# Altium PCB SENT.PcbDoc (part 2 of 2)
Units mil, origin at the board's own origin, x right, y up, seen from the top; angles counter-clockwise.
Board outline 2680 x 2680 mil, 2 copper layers (Top Layer, Bottom Layer); 78 components, 77 nets, 313 pads, 117 vias.
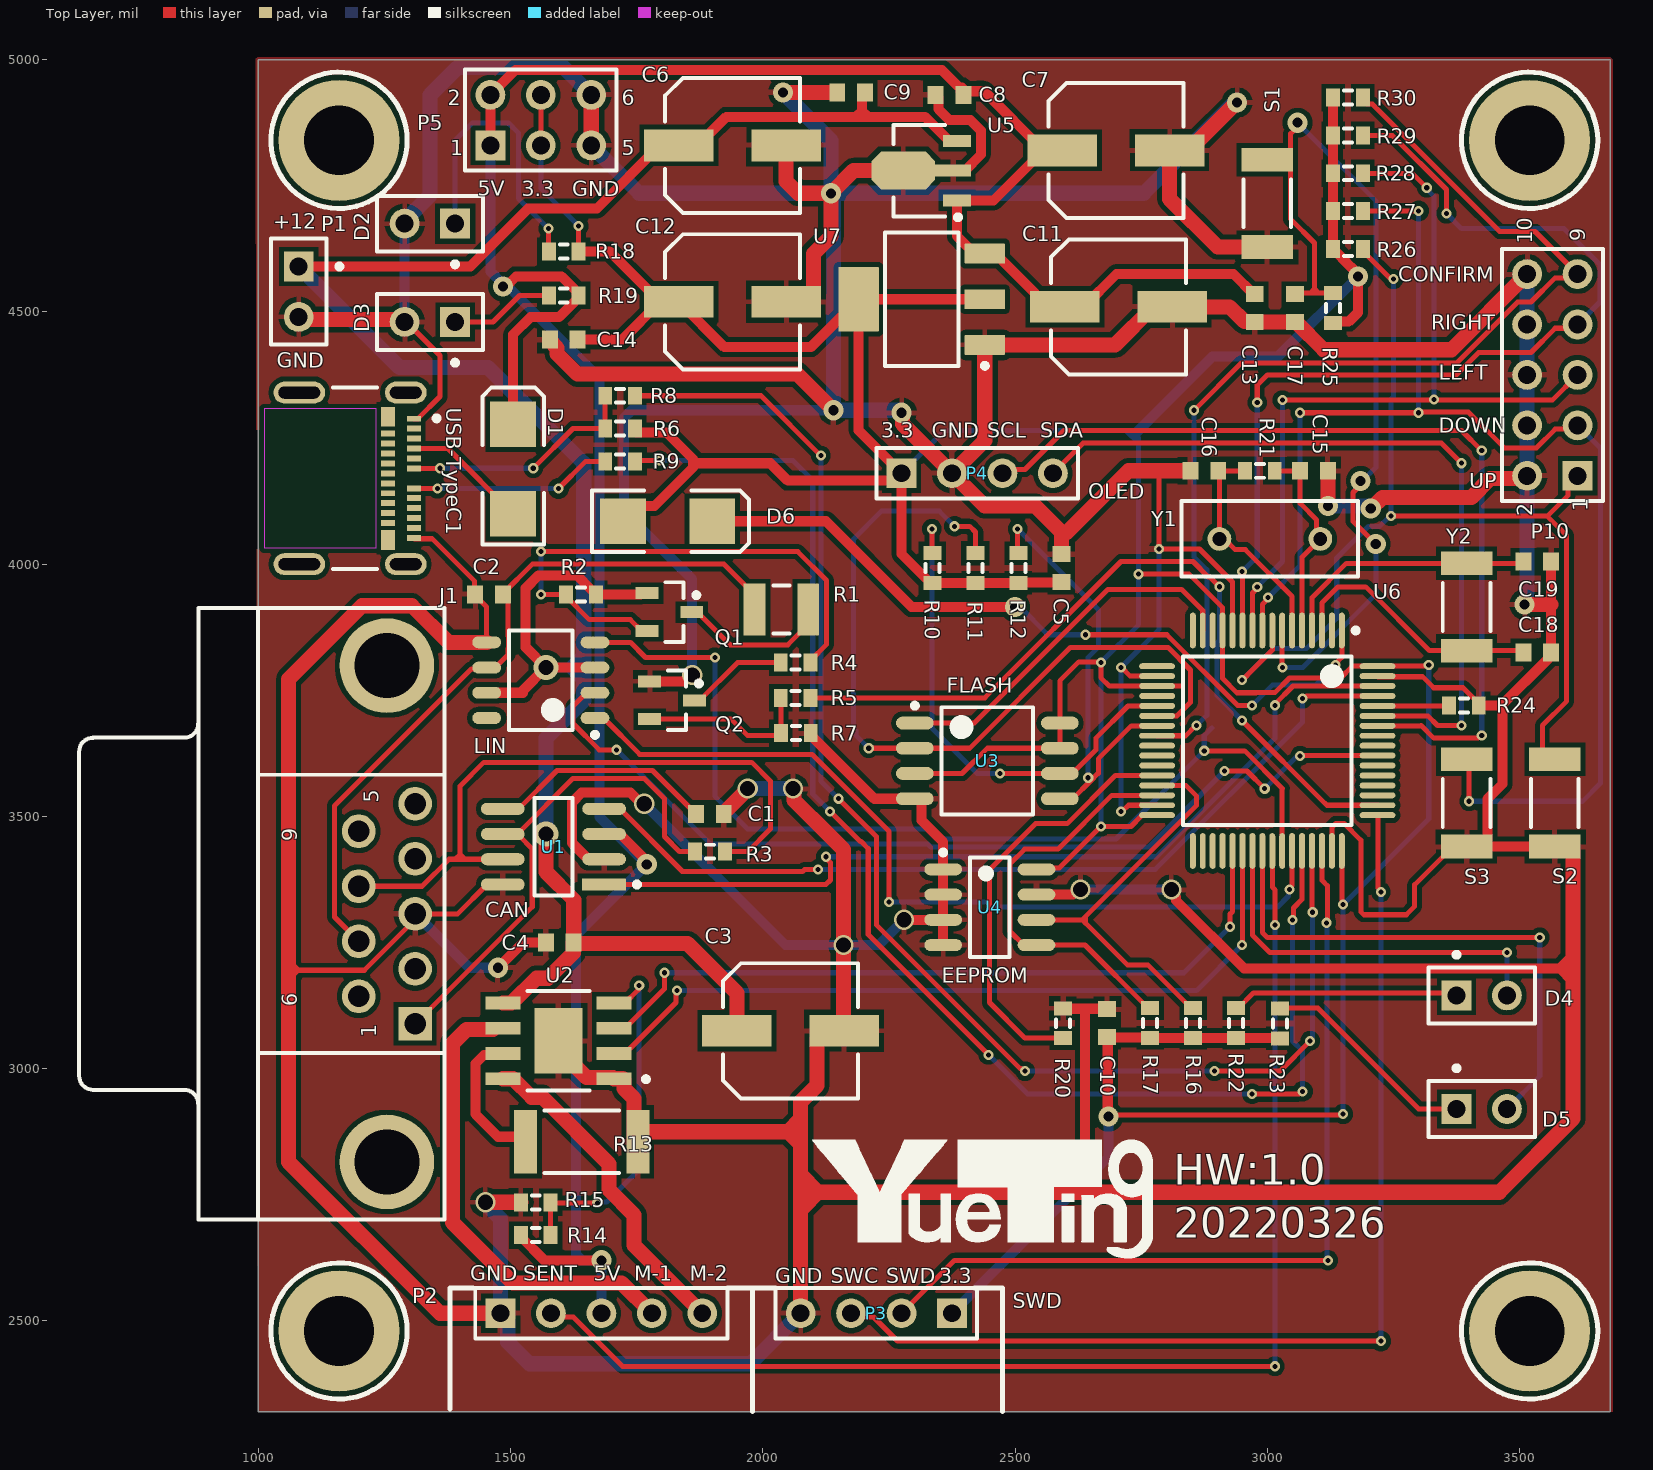
[diagram p0: Top Layer view]

## Via types
v1: diameter 20, hole 10, Top Layer to Bottom Layer, tented both sides, 88 vias
v2: diameter 40, hole 20, Top Layer to Bottom Layer, tented both sides, 18 vias
v3: diameter 40, hole 30, Top Layer to Bottom Layer, tented both sides, 9 vias
v4: diameter 50, hole 30, Top Layer to Bottom Layer, tented both sides, 2 vias

## Nets (pads, with @x,y where several pads share a name; then routed paths per layer and width w, separated by ;. In a path a pad name is that pad's centre, name@x,y a point inside that pad or via, vN(x,y) a via of type N, cw(c..) or ccw(c..) an arc to the next point about the centre after c; other vN are vias at no path point) (continued)
VCC: (continued)
  Bottom Layer w20: v4(1570,3795) 1615,3795 ; 1640,3795 1628.75,3795 ; 1645,3775 1635,3775 1615,3795 ; 1645,3811.25 1628.75,3795 ; 1645,3830 1645,3825 1615,3795 ; 1615,3795 1628.75,3795
  Bottom Layer w30: P1.1 1280,4390 1455,4390 1645,4200 1645,3830 ; v4(1570,3465) 1570,3655 1645,3730 1645,3775 1645,3811.25 1645,3825
pads on no net: J1.2 J1.4 J1.5 J1.6 J1.9 J1.10 J1.11 LIN.8 USB-TypeC1.1 USB-TypeC1.2 USB-TypeC1.3 USB-TypeC1.4 USB-TypeC1.A2 USB-TypeC1.A3 USB-TypeC1.A5 USB-TypeC1.A8 USB-TypeC1.A9 USB-TypeC1.A10 USB-TypeC1.A11 USB-TypeC1.B1 USB-TypeC1.B2 USB-TypeC1.B3 USB-TypeC1.B4 USB-TypeC1.B5 USB-TypeC1.B6 USB-TypeC1.B7 USB-TypeC1.B8 USB-TypeC1.B9 USB-TypeC1.B10 USB-TypeC1.B11 USB-TypeC1.B12

## Polygon pours and split planes (outlines as drawn)
GND on Bottom Layer "GND_L02_P000" (solid, pour order 0): 1000,5005 1005,5000 3680,5000 3680,2325 3670,2315 995,2315
GND on Top Layer "GND_L01_P001" (solid, pour order 1): 995,5005 3680,5005 3685,5000 3685,2320 1005,2320 1000,2325

## Silkscreen, mask and mechanical layers (free items; w line width, h text height)
Top Overlay:
  drawing of 21 lines, arcs and shapes, not listed
  text "5V" at 1435,4730 h30
  text "3.3" at 1521.82,4729.21 h30
  text "GND" at 1621.82,4729.21 h30
  text "+12" at 1030,4665 h30
  text "CONFIRM" at 3260,4560 h30
  text "RIGHT" at 3325,4465 h30
  text "GND" at 1036.82,4389.21 h30
  text "LEFT" at 3340,4365 h30
  text "DOWN" at 3340,4260 h30
  text "3.3" at 2235,4250 h30
  text "GND" at 2335,4250 h30
  text "SCL" at 2445,4250 h30
  text "SDA" at 2550,4250 h30
  text "UP" at 3400,4150 h30
  text "HW:1.0" at 2815,2770 h60
  text "20220326" at 2815,2665 h60
  text "GND" at 1420,2580 h30
  text "SENT" at 1525,2580 h30
  text "5V" at 1665,2580 h30
  text "M-1" at 1745,2580 h30
  text "M-2" at 1855,2580 h30
  text "GND" at 2025,2575 h30
  text "SWC" at 2135,2575 h30
  text "SWD" at 2245,2575 h30
  text "3.3" at 2350,2575 h30
Mechanical 1:
  lines w10: 1000,5000 1000,2320 3680,2320 3680,5000 1000,5000 ; 1000,5000 1000,5000

## Text inside footprints (layer, text, board x,y; h text height)
J1: Top Overlay "1" at 1234.09,3062.4 h30 r90; Top Overlay "5" at 1239.09,3527.4 h30 r90; Top Overlay "9" at 1076.85,3450.83 h30 r90; Top Overlay "6" at 1076.85,3123.66 h30 r90
P5: Top Overlay "1" at 1380,4810 h30; Top Overlay "2" at 1375,4910 h30; Top Overlay "5" at 1720,4810 h30; Top Overlay "6" at 1720,4910 h30
P10: Top Overlay "2" at 3525,4095 h30 r90; Top Overlay "1" at 3635,4105 h30 r90; Top Overlay "9" at 3630,4640 h30 r90; Top Overlay "10" at 3525,4635 h30 r90